# Altium PCB smart_oven.PcbDoc
Units mil, origin at the board's own origin, x right, y up, seen from the top; angles counter-clockwise.
Board outline 3850 x 4000 mil, 2 copper layers (Top Layer, Bottom Layer), stack 12.8 mil thick; 28 components, 41 nets, 108 pads, 15 vias.
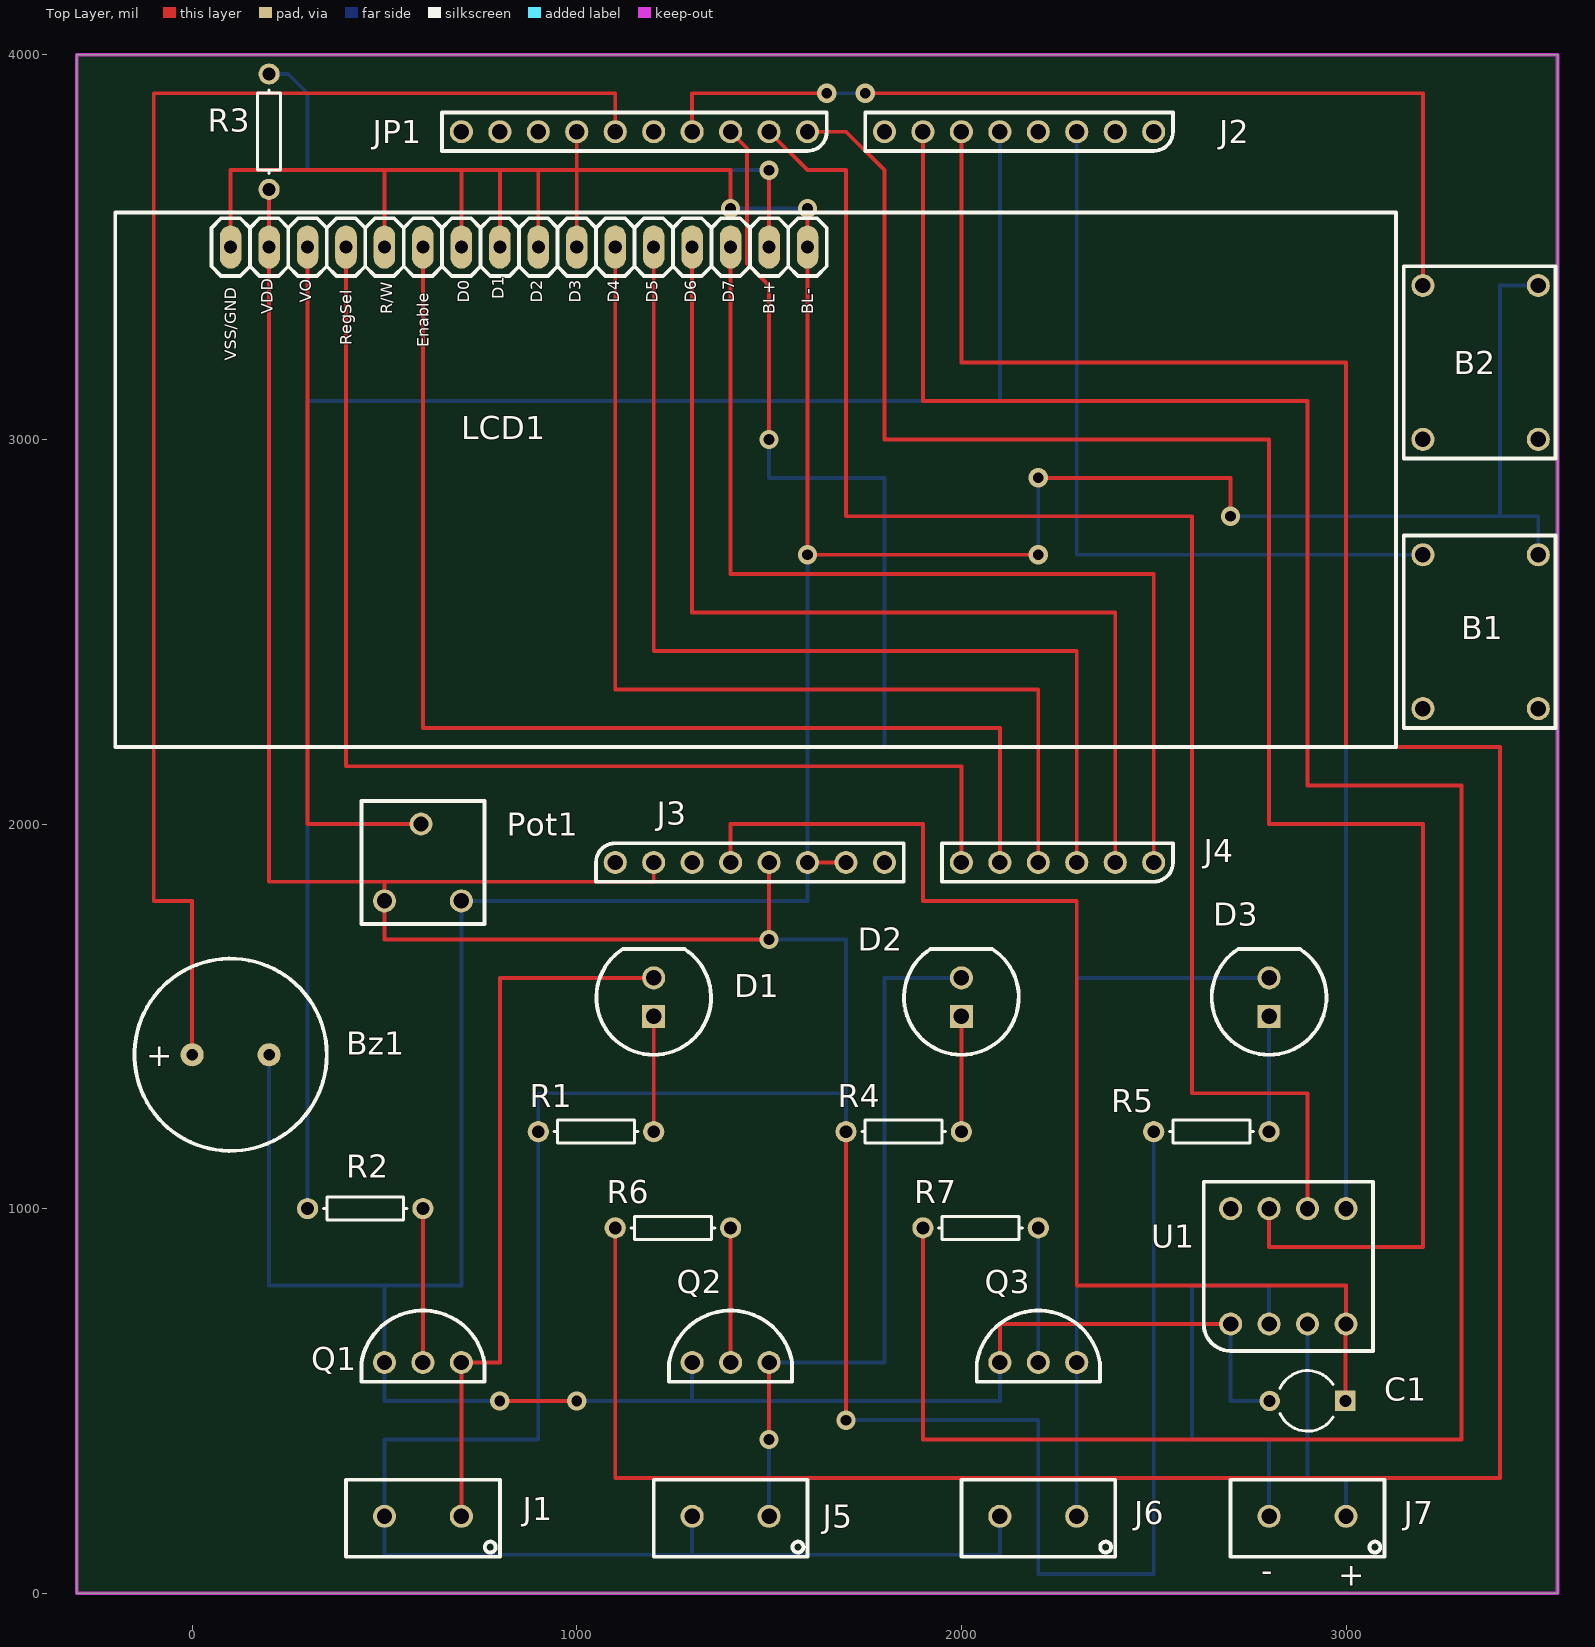
[diagram p0: Top Layer view]
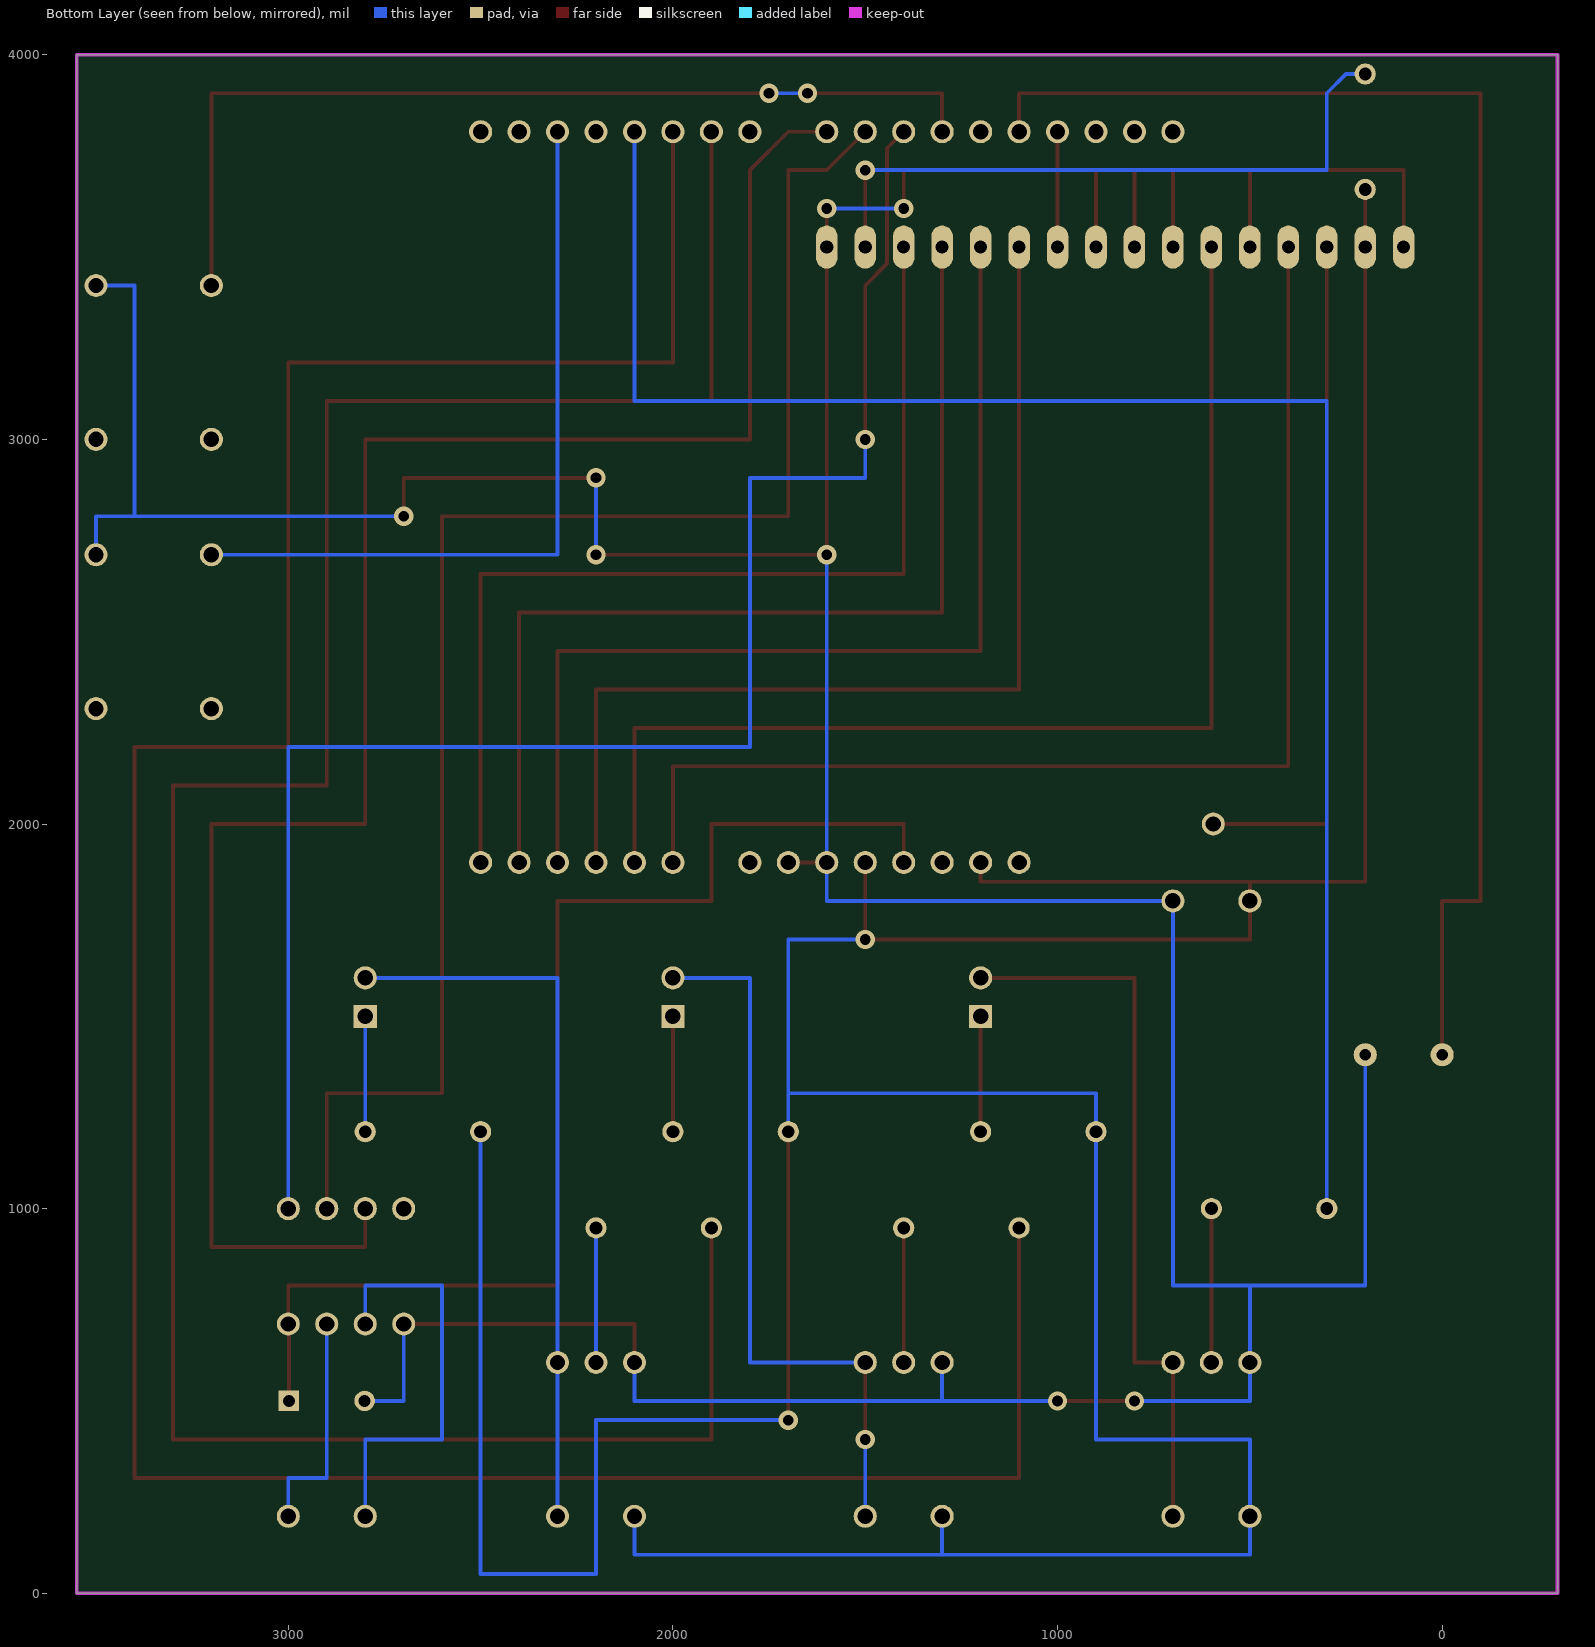
[diagram p1: Bottom Layer view, seen from below]

## Layer stack, top to bottom
Top Solder: solder mask 0.4, Solder Resist, Dk 3.5
Top Layer: signal copper 1.4
Dielectric 1: core 10, FR-4, Dk 4.2
Bottom Layer: signal copper 1.4
Bottom Solder: solder mask 0.4, Solder Resist, Dk 3.5

## Board outline
-300,0 -300,4000 3550,4000 3550,0

## Design rules (kind name [scope] priority, off if disabled: settings)
Clearance [OnLayer('Top Layer') vs OnLayer('Top Layer')] p1: gap=10
PolygonConnect [All] p1: connectstyle=Relief reliefconductorwidth=10 reliefentries=4 polygonreliefangle="90 Angle" airgapwidth=10
RoutingCorners [All] p1: cornerstyle=90-Degree minsetback=100 maxsetback=100
RoutingVias [All] p1: holewidth=28 width=50 viastyle="Through Hole" minholewidth=28 minwidth=50 maxholewidth=28 maxwidth=50
SilkToSolderMaskClearance [IsPad] p1: minsilkscreentomaskgap=9 clearancetoexposedcopper=TRUE
SolderMaskExpansion [All] p1: expansion=4
Width [All] p1: maxlimit=10 minlimit=10 preferedwidth=10
28 further rules are at their usual default settings.

## Components (designator, comment, footprint, x,y, rotation, side; value= is the part's Value field where it differs from the comment)
B1 "Bottom Button" "push button" 3200,2700 r0 top
B2 "Top Button" "push button" 3200,3400 r0 top
Bz1 "Buzzer" Buzzer 0,1400 r0 top
C1 "Cap2" CAPR5-4X5 2900,500 r180 top
D1 "LED" "LED TOP92" 1200,1500 r90 top
D2 "LED" "LED TOP92" 2000,1500 r90 top
D3 "LED" "LED TOP92" 2800,1500 r90 top
J1 "DG301-2P Connector" "DG301-2P Connector" 700,200 r180 top
J2 "8x1F-H8.5" PINHD-1X8 2500,3800 r180 top
J3 "8x1F-H8.5" PINHD-1X8 1100,1900 r0 top
J4 "6x1F-H8.5" PINHD-1X6 2500,1900 r180 top
J5 "DG301-2P Connector" "DG301-2P Connector" 1500,200 r180 top
J6 "DG301-2P Connector" "DG301-2P Connector" 2300,200 r180 top
J7 "DG301-2P Connector" "DG301-2P Connector" 3000,200 r180 top
JP1 "10x1F-H8.5" PINHD-1X10 1600,3800 r180 top
LCD1 "LCD1602" LCD1602 100,3500 r0 top
Pot1 "Potential Meter" "Axial ThrimPot" 500,1800 r0 top
Q1 "BJT NPN" "BJT TOP92" 500,600 r0 top
Q2 "BJT NPN" "BJT TOP92" 1300,600 r0 top
Q3 "BJT NPN" "BJT TOP92" 2100,600 r0 top
R1 "Res1" AXIAL-0.3 1050,1200 r180 top
R2 "Res1" AXIAL-0.3 450,1000 r180 top
R3 "Res1" AXIAL-0.3 200,3800 r270 top
R4 "Res1" AXIAL-0.3 1850,1200 r180 top
R5 "Res1" AXIAL-0.3 2650,1200 r180 top
R6 "Res1" AXIAL-0.3 1250,950 r180 top
R7 "Res1" AXIAL-0.3 2050,950 r180 top
U1 "MAX31855" "SOP8 Breakout" 2700,700 r90 top

## Footprints (in the part's own frame and the unit in brackets; to place one, negate y for a bottom-side part, rotate by r counter-clockwise, add the part's x,y. Pads: shape width x height; smd on the part's side, far side on the other; paste and mask are expansions set on the pad)
"Axial ThrimPot" [mil]
  round 60 hole 40: 1(0,0) 2(200,0) 3(95,200)
  silkscreen extent -60,-60 260,260
AXIAL-0.3 [mm] "Axial Device, Thru-Hole; 2 Leads; 0.3 in Pin Spacing"
  round 1.4 hole 0.85: 1(-3.81,0) 2(3.81,0)
  silkscreen extent -2.77,-0.76 2.77,0.76
"BJT TOP92" [mil]
  round 60 hole 40: b(100,0) c(200,0) e(0,0)
  silkscreen extent -60,-50 260,135
Buzzer [mil]
  round 60 hole 30: 1(0,0) 2(200,0)
  silkscreen extent -150,-250 350,250
CAPR5-4X5 [mm] "Capacitor; 2 Leads"
  rect 1.35x1.35 hole 0.8: 1(-2.5,0)
  round 1.35 hole 0.8: 2(2.5,0)
  silkscreen extent -1.69,-2 1.82,2
"DG301-2P Connector" [mil]
  round 60 hole 40: 1(0,0) 2(200,0)
  silkscreen extent -100,-95 300,105
LCD1602 [mil]
  oval 56x112 hole 34: 1(0,0) 2(100,0) 3(200,0) 4(300,0) 5(400,0) 6(500,0) 7(600,0) 8(700,0) 9(800,0) 10(900,0) 11(1000,0) 12(1100,0) 13(1200,0) 14(1300,0) 15(1400,0) 16(1500,0)
  silkscreen extent -300,-1300 3030,90
"LED TOP92" [mil]
  round 60 hole 40: N(100,0)
  rect 60x60 hole 40: P(0,0)
  silkscreen extent -100,-149 175,149
PINHD-1X6 [mil]
  round 60 hole 40: 1(0,0) 2(100,0) 3(200,0) 4(300,0) 5(400,0) 6(500,0)
  silkscreen extent -50,-50 550,50
PINHD-1X8 [mil]
  round 60 hole 40: 1(0,0) 2(100,0) 3(200,0) 4(300,0) 5(400,0) 6(500,0) 7(600,0) 8(700,0)
  silkscreen extent -50,-50 750,50
PINHD-1X10 [mil]
  round 60 hole 40: 1(0,0) 2(100,0) 3(200,0) 4(300,0) 5(400,0) 6(500,0) 7(600,0) 8(700,0) 9(800,0) 10(900,0)
  silkscreen extent -50,-50 950,50
"push button" [mil] "push button"
  round 60 hole 40: 1(0,0) 2(300,0) 3(0,-400) 4(300,-400)
  silkscreen extent -50,-450 345,50
"SOP8 Breakout" [mil] "SOP8 to Through Hole with 100mil pitch."
  round 60 hole 40: 1(0,0) 2(0,-100) 3(0,-200) 4(0,-300) 5(300,-300) 6(300,-200) 7(300,-100) 8(300,0)
  silkscreen extent -70,-370 370,70

## Part data
B1 B2: library part "Push Button", "Push Button"
Bz1: "Piezo Buzzer"
C1: "Capacitor"
J2 J3: library part PINHD-1X8, "PIN HEADER"
J4: library part PINHD-1X6, "PIN HEADER"
JP1: library part PINHD-1X10, "PIN HEADER"
LCD1: "LCD 1602"
R1 R2 R3 R4 R5 R6 R7: "Resistor"
U1: "K thermal-couple reading IC"

## Via types
v1: diameter 50, hole 28, Top Layer to Bottom Layer, 15 vias

## Nets (pads, with @x,y where several pads share a name; then routed paths per layer and width w, separated by ;. In a path a pad name is that pad's centre, name@x,y a point inside that pad or via, vN(x,y) a via of type N, cw(c..) or ccw(c..) an arc to the next point about the centre after c; other vN are vias at no path point)
+3V3: C1.1 J3.4 U1.4 | length 3198.4
  Top Layer w10: J3.4 1400,2000 1900,2000 1900,1800 2300,1800 2300,800 3000,800 U1.4 ; C1.1 U1.4@2998.43,698.43
+5V: J1.2 J3.2 J3.5 J5.2 J6.2 LCD1.2 Pot1.1 R1.2 R3.2 R4.2 R5.2 | length 12200
  Top Layer w10: R3.2 LCD1.2 200,1850 500,1850 ; J3.2 1200,1850 500,1850 ; J3.5 v1(1500,1700) 500,1700 Pot1.1 500,1850 ; v1(1700,450) R4.2
  Bottom Layer w10: J5.2 1300,100 ; v1(1500,1700) 1700,1700 1700,1300 ; v1(1700,450) 2200,450 2200,50 2500,50 R5.2 ; R4.2 1700,1300 ; J6.2 2100,100 1300,100 ; 1300,100 500,100 J1.2 500,400 900,400 R1.2 900,1300 1700,1300
A0: J4.6 LCD1.4 | length 3200
  Top Layer w10: LCD1.4 400,2150 2000,2150 J4.6
A1: J4.5 LCD1.6 | length 3100
  Top Layer w10: LCD1.6 600,2250 2100,2250 J4.5
A2: J4.4 LCD1.11 | length 2700
  Top Layer w10: LCD1.11 1100,2350 2200,2350 J4.4
A3: J4.3 LCD1.12 | length 2700
  Top Layer w10: LCD1.12 1200,2450 2300,2450 J4.3
A4: J4.2 LCD1.13 | length 2700
  Top Layer w10: LCD1.13 1300,2550 2400,2550 J4.2
A5: J4.1 LCD1.14 | length 2700
  Top Layer w10: LCD1.14 1400,2650 2500,2650 J4.1
AREF: JP1.8
D0/RX: J2.1
D1/TX: J2.2
D2/SDA: B1.1 J2.3 | length 2000
  Bottom Layer w10: J2.3 2300,2700 B1.1
D3/SCL: J2.4
D4: J2.5 R2.2 | length 4600
  Bottom Layer w10: R2.2 300,3100 2100,3100 J2.5
D5: J2.6 R6.2 | length 7850
  Top Layer w10: R6.2 1100,300 3400,300 3400,2200 3000,2200 3000,3200 2000,3200 J2.6
D6: J2.7 R7.2 | length 6750
  Top Layer w10: R7.2 1900,400 3300,400 3300,2100 2900,2100 2900,3100 1900,3100 J2.7
D7: J2.8
D8: JP1.1 U1.7 | length 4941.4
  Top Layer w10: JP1.1 1700,3800 1800,3700 1800,3000 2800,3000 2800,2000 3200,2000 3200,900 2800,900 U1.7
D9: JP1.2 U1.6 | length 4141.4
  Top Layer w10: JP1.2 1600,3700 1700,3700 1700,2800 2600,2800 2600,1300 2900,1300 U1.6
D10: JP1.3 U1.5 | length 4341.4
  Top Layer w10: JP1.3 1443,3757 1443,3457 1500,3400 1500,3374.19 v1(1500,3000)
  Bottom Layer w10: v1(1500,3000) 1500,2900 1800,2900 1800,2200 3000,2200 U1.5
D11: B2.1 JP1.4 | length 2500
  Top Layer w10: JP1.4 1300,3900 v1(1650,3900) ; v1(1750,3900) 3200,3900 B2.1
  Bottom Layer w10: v1(1650,3900) v1(1750,3900)
D12: JP1.5
D13: Bz1.1 JP1.6 | length 3900
  Top Layer w10: Bz1.1 0,1800 -100,1800 -100,3900 1100,3900 JP1.6
GND: B1.2 B2.2 Bz1.2 C1.2 J3.6 J3.7 JP1.7 LCD1.1 LCD1.5 LCD1.7 LCD1.8 LCD1.9 LCD1.10 LCD1.16 Pot1.2 Q1.e Q2.e Q3.e U1.1 | length 13901.6
  Top Layer w10: LCD1.1 100,3700 500,3700 ; LCD1.5 500,3700 ; LCD1.7 700,3700 ; v1(800,500) v1(1000,500) ; LCD1.8 800,3700 ; LCD1.9 900,3700 ; LCD1.10 1000,3700 ; JP1.7 1000,3700 ; v1(1400,3600) 1400,3700 1000,3700 ; J3.6 J3.7 ; v1(1600,3600) LCD1.16 v1(1600,2700) v1(2200,2700) ; Q3.e 2100,700 U1.1 ; v1(2200,2900) 2700,2900 v1(2700,2800) ; 500,3700 700,3700 ; 700,3700 800,3700 ; 800,3700 900,3700 ; 900,3700 1000,3700
  Bottom Layer w10: Bz1.2 200,800 500,800 ; v1(800,500) 500,500 Q1.e 500,800 ; v1(1000,500) 1300,500 ; Q2.e 1300,500 ; v1(1400,3600) v1(1600,3600) ; v1(1600,2700) J3.6 1600,1800 Pot1.2 700,800 500,800 ; Q3.e 2100,500 1300,500 ; v1(2200,2700) v1(2200,2900) ; U1.1 2700,500 C1.2 ; v1(2700,2800) 3400,2800 ; B1.2 3500,2800 3400,2800 ; B2.2 3400,3400 3400,2800
NetD1_1: D1.P R1.1 | length 300
  Top Layer w10: R1.1 D1.P
NetD1_2: D1.N J1.1 Q1.c | length 1900
  Top Layer w10: J1.1 Q1.c 800,600 800,1600 D1.N
NetD2_1: D2.P R4.1 | length 300
  Top Layer w10: R4.1 D2.P
NetD2_2: D2.N J5.1 Q2.c | length 1900
  Top Layer w10: v1(1500,400) Q2.c
  Bottom Layer w10: J5.1 v1(1500,400) ; Q2.c 1800,600 1800,1600 D2.N
NetD3_1: D3.P R5.1 | length 300
  Bottom Layer w10: R5.1 D3.P
NetD3_2: D3.N J6.1 Q3.c | length 1900
  Bottom Layer w10: J6.1 Q3.c 2300,1600 D3.N
NetJ7_1: J7.1 U1.3 | length 600
  Bottom Layer w10: U1.3 2900,300 3000,300 J7.1
NetJ7_2: J7.2 U1.2 | length 1100
  Bottom Layer w10: J7.2 2800,400 2600,400 2600,800 2800,800 U1.2
NetLCD1_3: LCD1.3 Pot1.3 | length 1795
  Top Layer w10: LCD1.3 300,2000 Pot1.3
NetLCD1_15: LCD1.15 R3.1 | length 1720.7
  Top Layer w10: LCD1.15 v1(1500,3700)
  Bottom Layer w10: R3.1 250,3950 300,3900 300,3700 v1(1500,3700)
NetQ1_b: Q1.b R2.1 | length 400
  Top Layer w10: Q1.b R2.1
NetQ2_b: Q2.b R6.1 | length 350
  Top Layer w10: Q2.b R6.1
NetQ3_b: Q3.b R7.1 | length 350
  Bottom Layer w10: Q3.b R7.1
RESET: J3.3
SCL: JP1.10
SDA: JP1.9
VIN: J3.8
pads on no net: B1.3 B1.4 B2.3 B2.4 J3.1 U1.8

## Keep-outs
Keep-Out Layer:
  the board outline again, w10

## Silkscreen, mask and mechanical layers (free items; w line width, h text height)
Top Overlay:
  text "-" at 2780,30 h60
  text "+" at 2980,20 h60
Mechanical 1:
  the board outline again, w10

## Dimensions
-300,4000 to 1640,4010 on Mechanical 1
-300,3995.06 to -300,1995.06 on Mechanical 1
-300,4000 to 3550,4000 on Mechanical 1
-300,4000 to -300,0 on Mechanical 1

## Text inside footprints (layer, text, board x,y; h text height)
Bz1: Top Overlay "+" at -120,1370 h60
LCD1: Top Overlay "BL-" at 1615,3325.01 h30 r90; Top Overlay "D7" at 1410,3355 h30 r90; Top Overlay "D6" at 1310,3355 h30 r90; Top Overlay "D5" at 1210,3355 h30 r90; Top Overlay "D4" at 1110,3355 h30 r90; Top Overlay "D3" at 1010,3355 h30 r90; Top Overlay "D2" at 910,3355 h30 r90; Top Overlay "D1" at 810,3365 h30 r90; Top Overlay "BL+" at 1515,3325.01 h30 r90; Top Overlay "D0" at 720,3355 h30 r90; Top Overlay "Enable" at 615,3240.04 h30 r90; Top Overlay "R/W" at 520,3325.01 h30 r90; Top Overlay "RegSel" at 415,3245.04 h30 r90; Top Overlay "VO" at 310,3355 h30 r90; Top Overlay "VDD" at 210,3325.01 h30 r90; Top Overlay "VSS/GND" at 115,3205.05 h30 r90